# EAGLE board triac_test (EAGLE 6.2)
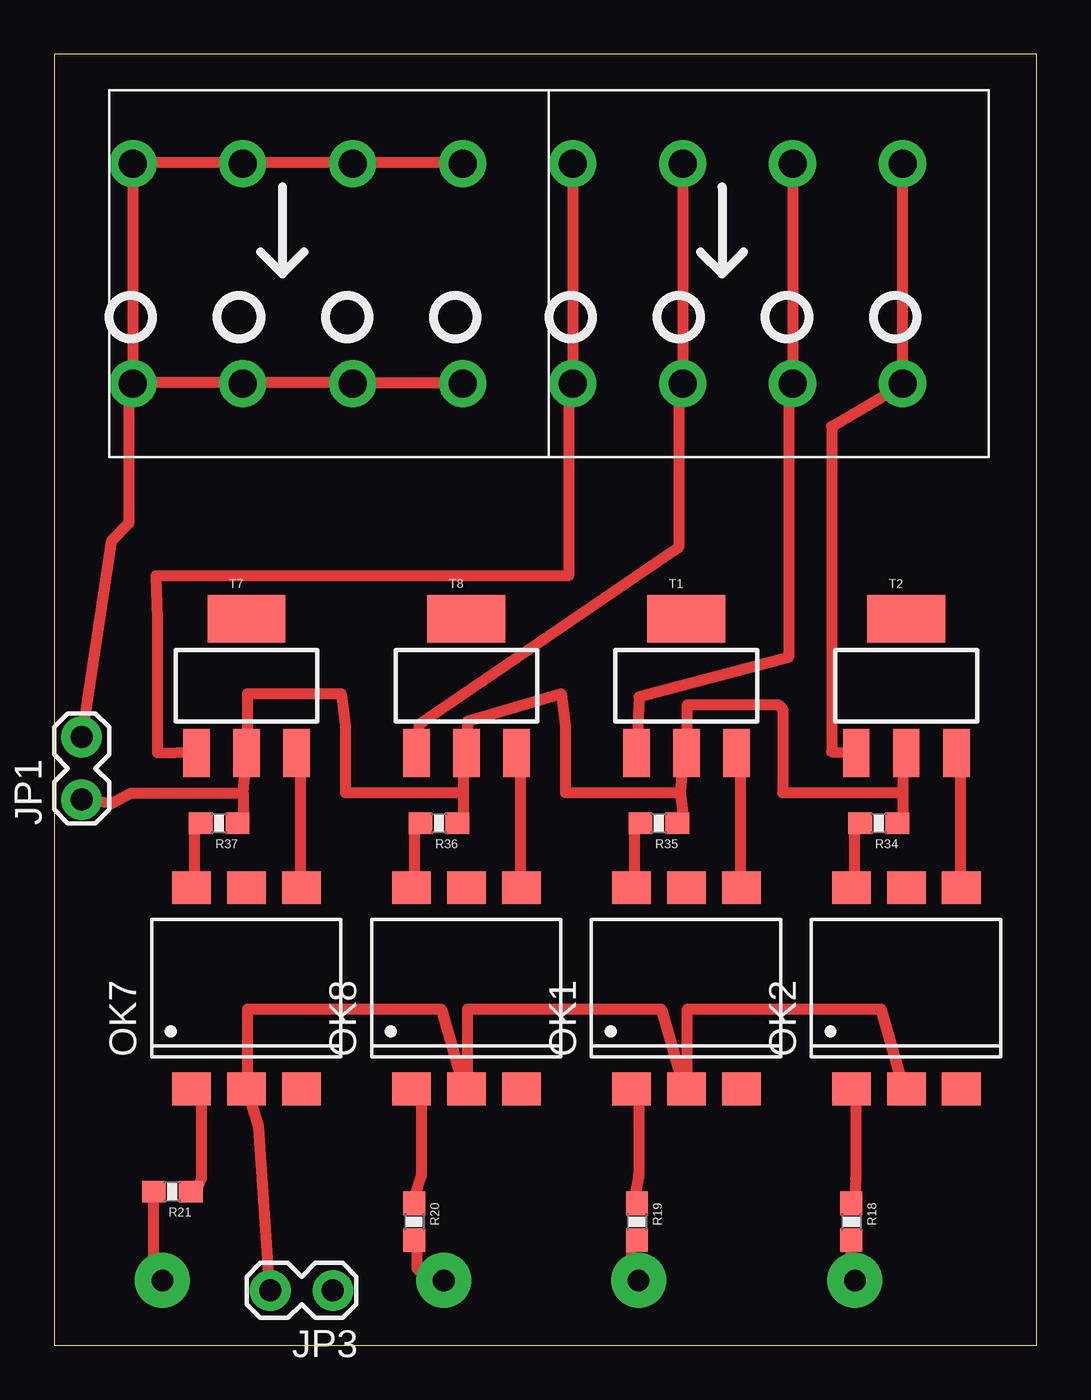
[diagram p0: board, top side]

Size 45.39 x 59.68 mm. Coordinates in mm from the lower left corner, seen from the top.
Outline: 0,0 45.39,0 45.39,59.68 0,59.68 0,0
Copper layers (1*16): Top 0.035mm / dielectric 1.5mm / Bottom 0.035mm
Design rules: minimum track width 10mil, minimum drill 24mil, track to track 8mil, track to pad 8mil, pad to pad 8mil, via to via 8mil, smd to smd 8mil, copper to edge 40mil, drill to drill 8mil, minimum pad ring 10mil, minimum via ring 8mil, stop-mask expansion 4mil, vias tented up to drill 0mil, thermal gap 10mil

## Footprints (pad centres in the part's own frame; a part is rotated, then mirrored left to right if it is on the bottom)
1X02_LOCK = drill 1.016 pad 1.88: 1 -0.178,0; 2 2.718,0
PHOENIX_TERMINAL_4 = drill 1.3 pad 2.184: 1B 1.1,-5.08; 1T 1.1,5.08; 2B 6.18,-5.08; 2T 6.18,5.08; 3B 11.26,-5.08; 3T 11.26,5.08; 4B 16.34,-5.08; 4T 16.34,5.08
DIL6-SMD = smd 1.78 x 1.52: 1 -2.54,-4.645; 2 0,-4.645; 3 2.54,-4.645; 4 2.54,4.645; 5 0,4.645; 6 -2.54,4.645
0603-RES = smd 1.1 x 1: 1 -0.85,0; 2 0.85,0
SOT223 = smd 1.219 x 2.235: 1 -2.311,-3.099; 2 0,-3.099; 3 2.311,-3.099 | smd 3.6 x 2.2: 4 0,3.099

## Placement (x,y rotation side)
JP1  [1X02_LOCK]  1.27,25.4 90 top
JP2  Stations 1-4  [PHOENIX_TERMINAL_4]  22.86,49.53 0 top
JP3  [1X02_LOCK]  12.7,2.54 180 top
JP6  COM  [PHOENIX_TERMINAL_4]  2.54,49.53 0 top
OK1  MOC3032S  [DIL6-SMD]  29.21,16.51 0 top
OK2  MOC3032S  [DIL6-SMD]  39.37,16.51 0 top
OK7  MOC3032S  [DIL6-SMD]  8.89,16.51 0 top
OK8  MOC3032S  [DIL6-SMD]  19.05,16.51 0 top
R18  330  [0603-RES]  36.83,5.71 270 top
R19  330  [0603-RES]  26.92,5.71 270 top
R20  330  [0603-RES]  16.64,5.71 270 top
R21  330  [0603-RES]  5.46,7.11 180 top
R34  33  [0603-RES]  38.1,24.13 180 top
R35  33  [0603-RES]  27.94,24.13 180 top
R36  33  [0603-RES]  17.78,24.13 180 top
R37  33  [0603-RES]  7.62,24.13 180 top
T1  LF-TRIACSOT223  [SOT223]  29.21,30.48 0 top
T2  LF-TRIACSOT223  [SOT223]  39.37,30.48 0 top
T7  LF-TRIACSOT223  [SOT223]  8.89,30.48 0 top
T8  LF-TRIACSOT223  [SOT223]  19.05,30.48 0 top

## Library data of the parts
JP1 JP3 = SparkFun-Connectors
JP2 JP6 T1 T2 T7 T8 = lizardworx
OK1 OK2 OK7 OK8 = lizardworx; MF: FAIRCHILD SEMICONDUCTOR; MPN: MOC3032S-M; OC_FARNELL: unknown; OC_NEWARK: 05C2871
R18-R21 R34-R37 = SparkFun-Passives

## Nets
3.3V: JP3.1
AC_HOT: JP1.1 R34.1 R35.1 R36.1 R37.1 T1.2 T2.2 T7.2 T8.2
AC_NEUTRAL: JP1.2 JP6.1B JP6.1T JP6.2B JP6.2T JP6.3B JP6.3T JP6.4B JP6.4T
CNTRL_1: R18.2
CNTRL_2: R19.2
CNTRL_3: R20.2
CNTRL_4: R21.2
GND: JP3.2 OK1.2 OK2.2 OK7.2 OK8.2
N$2: OK1.1 R19.1
N$6: OK1.6 R35.2
N$8: OK1.4 T1.3
N$9: OK2.1 R18.1
N$12: OK2.6 R34.2
N$14: OK2.4 T2.3
N$45: OK7.1 R21.1
N$46: OK7.6 R37.2
N$48: OK7.4 T7.3
N$51: OK8.1 R20.1
N$52: OK8.6 R36.2
N$54: OK8.4 T8.3
STATION_1: JP2.4B JP2.4T T2.1
STATION_2: JP2.3B JP2.3T T1.1
STATION_3: JP2.2B JP2.2T T8.1
STATION_4: JP2.1B JP2.1T T7.1

## Tracks (layer width: path | path; a pad name or v marks a point on that pad's centre or on a via)
AC_HOT
  Top 0.254: 39.22,24.38 39.01,24.18 R34.1 | 39.22,27.23 T2.2 | 29.06,24.38 28.85,24.18 R35.1 | 29.06,27.23 T1.2 29.26,27.43 | 18.9,24.38 18.69,24.18 R36.1 | 18.9,27.23 T8.2 19.1,27.43 | 8.74,24.38 8.53,24.18 R37.1 | 8.74,25.53 8.74,27.23 T7.2 8.94,27.43
  Top 0.508: 39.22,27.23 39.22,25.55 | 39.22,25.55 39.22,24.38 | 29.06,27.23 28.93,25.55 | 28.93,25.55 29.06,24.38 | 18.9,27.23 18.9,25.55 | 18.9,25.55 18.9,24.38 | 8.74,25.53 8.74,24.38 | 8.74,25.53 3.53,25.53 2.64,25.04 JP1.1 | 8.74,25.53 T7.2 | 18.9,25.55 13.46,25.55 13.46,28.65 13.26,30.12 8.94,30.12 8.94,27.43 | 28.93,25.55 23.62,25.55 23.62,28.65 23.42,30.12 19.1,28.85 19.1,27.43 | 39.22,25.55 33.66,25.55 33.66,29.41 33.45,29.62 29.26,29.62 29.26,27.43
AC_NEUTRAL
  Top 0.254: 18.69,54.66 JP6.4T | 8.74,54.66 JP6.2T | 13.61,54.66 JP6.3T | 8.74,44.5 JP6.2B | 18.69,44.5 JP6.4B | 13.82,44.5 JP6.3B | 3.66,54.46 JP6.1T | 3.66,44.5 JP6.1B
  Top 0.508: JP6.1T 3.66,54.66 8.53,54.66 JP6.2T | 18.69,54.66 13.82,54.66 JP6.3T | 13.61,54.66 8.74,54.66 | JP1.2 2.64,37.19 3.45,38 3.45,44.3 JP6.1B | 8.74,44.5 13.61,44.5 JP6.3B | 13.82,44.5 18.69,44.5 | JP6.2B 8.53,44.5 3.66,44.5 3.66,54.46
GND
  Top 0.254: 8.94,11.79 OK7.2 8.94,11.99 | 9.96,2.64 JP3.2 | 18.9,11.99 OK8.2 19.1,11.99 | 29.06,11.99 OK1.2 29.26,11.99 | 39.22,11.99 OK2.2
  Top 0.508: 8.94,11.79 9.45,10.13 9.96,2.64 | 18.9,11.99 17.88,15.54 8.94,15.54 8.94,11.99 | 29.06,11.99 28.04,15.54 19.1,15.54 19.1,11.99 | 39.22,11.99 38.2,15.54 29.26,15.54 29.26,11.99
N$1  (via drill 1 pad 2.54)
  other vias: 5,3
N$2
  Top 0.254: 27,11.48 26.82,11.79 OK1.1 | 26.82,6.91 R19.1
  Top 0.508: 26.82,6.91 27,7.85 27,11.48
N$3  (via drill 1 pad 2.54)
  other vias: 18,3
N$4  (via drill 1 pad 2.54)
  other vias: 27,3
N$5  (via drill 1 pad 2.54)
  other vias: 37,3
N$6
  Top 0.254: 26.82,23.77 27.03,23.98 R35.2 | 26.82,21.34 OK1.6
  Top 0.508: 26.82,21.34 26.82,23.77
N$7
  Top 0.508: 4.57,6.86 4.57,3.43
N$8
  Top 0.254: 31.7,21.34 OK1.4 | 31.7,27.23 T1.3
  Top 0.508: 31.7,27.23 31.7,21.34
N$9
  Top 0.254: 37.03,11.61 36.98,11.79 OK2.1 | 36.98,6.91 R18.1
  Top 0.508: 36.98,6.91 37.03,7.72 37.03,11.61
N$10
  Top 0.508: 16.76,4.57 16.76,3.56 17.02,3.3
N$11
  Top 0.508: 26.67,4.57 26.67,3.3 26.42,3.05
N$12
  Top 0.254: 36.98,23.77 37.19,23.98 R34.2 | 36.98,21.34 OK2.6
  Top 0.508: 36.98,21.34 36.98,23.77
N$13
  Top 0.508: 36.83,3.81 36.83,4.57 36.7,4.7
N$14
  Top 0.254: 41.86,21.34 OK2.4 | 41.86,27.23 T2.3
  Top 0.508: 41.86,27.23 41.86,21.34
N$45
  Top 0.254: 6.81,11.23 6.5,11.79 OK7.1 | 6.5,6.91 R21.1
  Top 0.508: 6.5,6.91 6.81,7.72 6.81,11.23
N$46
  Top 0.254: 6.5,23.77 6.71,23.98 R37.2 | 6.5,21.34 OK7.6
  Top 0.508: 6.5,21.34 6.5,23.77
N$48
  Top 0.254: 11.38,21.34 OK7.4 | 11.38,27.23 T7.3
  Top 0.508: 11.38,27.23 11.38,21.34
N$51
  Top 0.254: 16.97,11.35 16.66,11.79 OK8.1 | 16.66,6.91 R20.1
  Top 0.508: 16.66,6.91 16.97,7.85 16.97,11.35
N$52
  Top 0.254: 16.66,23.77 16.87,23.98 R36.2 | 16.66,21.34 OK8.6
  Top 0.508: 16.66,21.34 16.66,23.77
N$54
  Top 0.254: 21.54,21.34 OK8.4 | 21.54,27.23 T8.3
  Top 0.508: 21.54,27.23 21.54,21.34
STATION_1
  Top 0.254: 39.01,44.3 JP2.4B | 39.22,54.46 JP2.4T
  Top 0.508: 39.01,44.3 35.92,42.47 35.92,27.43 T2.1 | 39.22,54.46 39.22,44.5 JP2.4B
STATION_2
  Top 0.254: 34.14,54.46 JP2.3T | 34.14,44.5 JP2.3B
  Top 0.508: T1.1 27.03,29.97 33.93,31.8 33.93,44.3 JP2.3B | 34.14,44.5 34.14,54.46
STATION_3
  Top 0.254: 28.85,44.3 JP2.2B | 29.06,54.46 JP2.2T
  Top 0.508: 28.85,44.3 28.85,36.88 16.87,28.7 T8.1 | 29.06,54.46 29.06,44.5 JP2.2B
STATION_4
  Top 0.254: 6.5,27.43 T7.1 | 23.98,54.46 JP2.1T | 23.98,44.5 JP2.1B
  Top 0.508: 6.5,27.43 4.78,27.38 4.78,33.6 4.7,35.56 23.77,35.56 23.77,44.3 JP2.1B | 23.98,44.5 23.98,54.46